# EAGLE board Joulev2_RealTime (EAGLE 8.1.1)
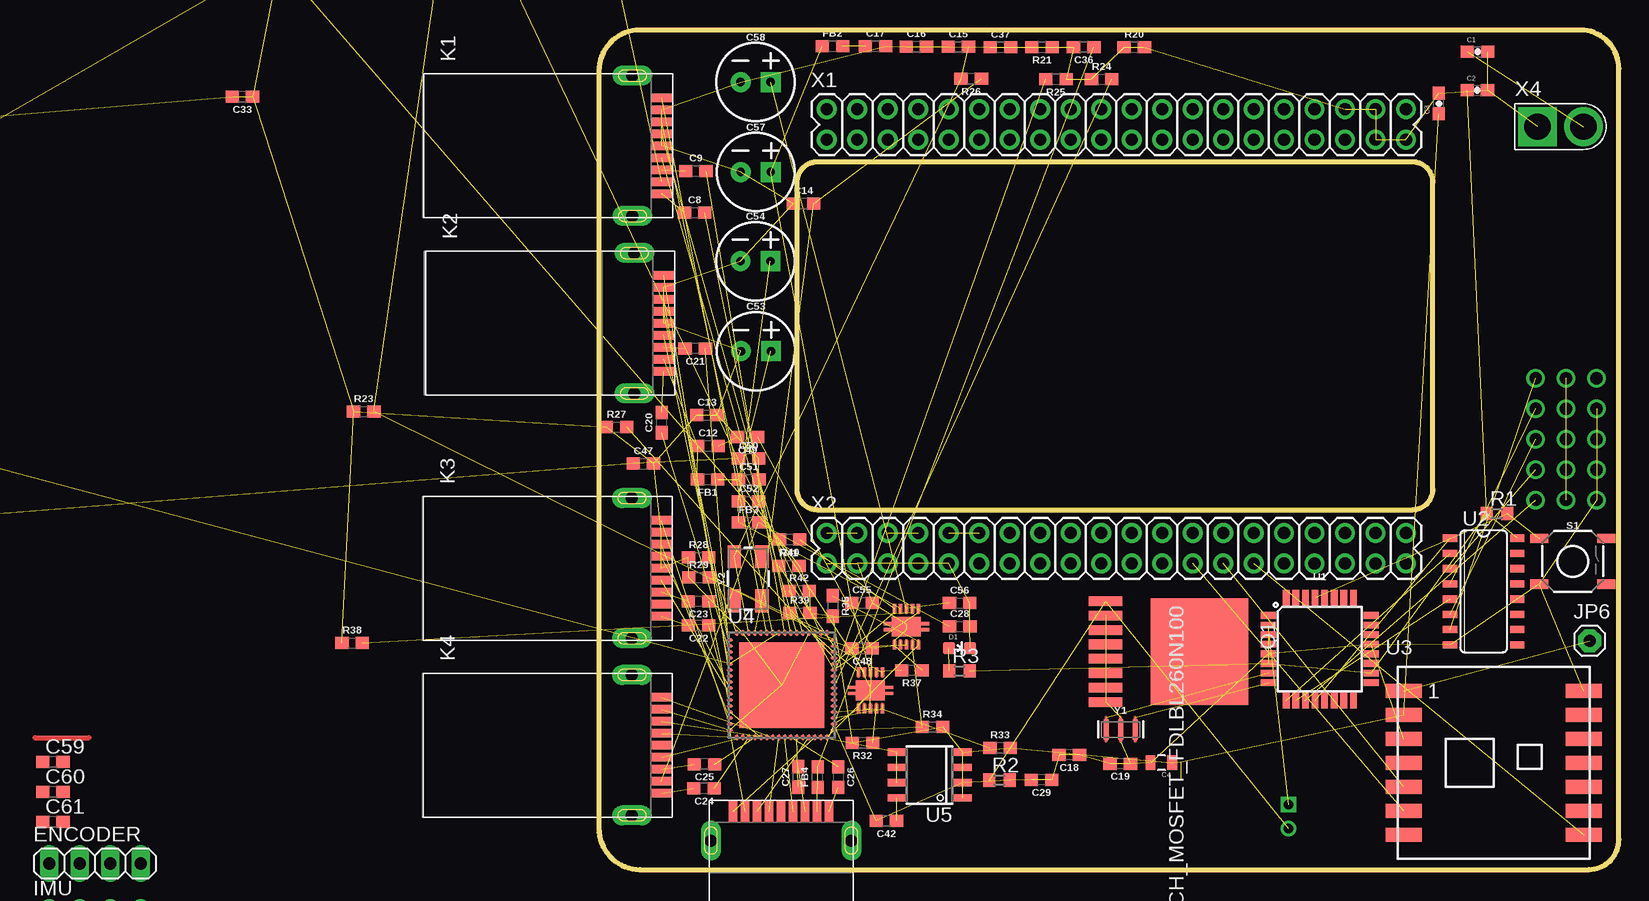
[diagram p0: board, top side]
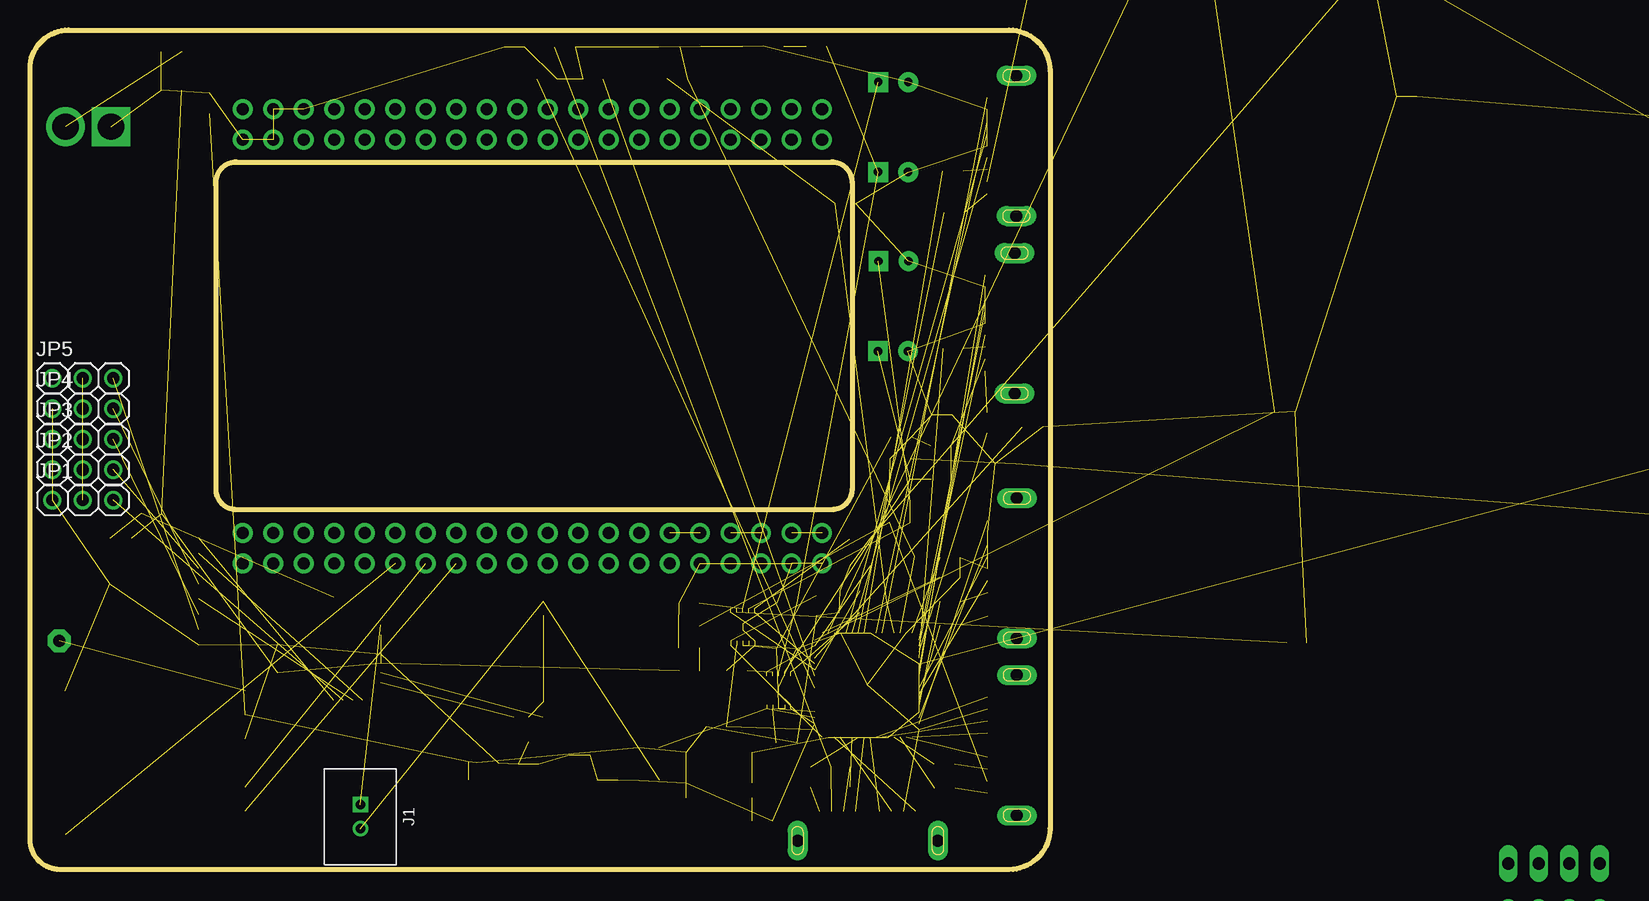
[diagram p1: board, bottom side, seen from below]

Size 85 x 70 mm. Coordinates in mm from the lower left corner, seen from the top.
Outline: 85,2.5 85,66.78 arc90 81.78,70 3.41,70 arc90 0,66.59 0,3.41 arc90 3.41,0 82.5,0 arc90 85,2.5
Outline: 16.5,57.29 16.5,31.71 arc90 18.21,30 67.79,30 arc90 69.5,31.71 69.5,57.29 arc90 67.79,59 18.21,59 arc90 16.5,57.29
Copper layers (1*16): Top 0.035mm / dielectric 1.5mm / Bottom 0.035mm
Design rules "default": minimum track width 10mil, minimum drill 24mil, track to track 8mil, track to pad 8mil, pad to pad 8mil, via to via 8mil, smd to smd 8mil, copper to edge 40mil, drill to drill 8mil, minimum pad ring 10mil, minimum via ring 8mil, stop-mask expansion 4mil, vias tented up to drill 0mil, thermal gap 10mil

## Footprints (pad centres in the part's own frame; a part is rotated, then mirrored left to right if it is on the bottom)
0603-CAP = smd 1.1 x 1: 1 -0.85,0; 2 0.85,0
0805@1 = smd 0.8 x 1.2: 1 -0.9,0; 2 0.9,0
0603 = smd 1.1 x 1: 1 -0.85,0; 2 0.85,0
CPOL-RADIAL-2.5MM-6.5MM = drill 0.7 pad 1.651 square: 1 1.25,0 | drill 0.7 pad 1.651: 2 -1.25,0
C0603 = smd 1.1 x 1: 1 -0.85,0; 2 0.85,0
LED-0603 = smd 1 x 1: A 0,-0.877; C 0,0.877
1X04 = drill 1.016 long: 1 -3.81,0; 2 -1.27,0; 3 1.27,0; 4 3.81,0
TO263-3 = smd 1.067 x 2.159: 1 -2.54,-5.791; 2 0,-5.791; 3 2.54,-5.791 | smd 10.8 x 10.41: TAB 0,2.54
2MM-2-V = drill 0.8 square: 1 0,0 | drill 0.8: 2 2,0
1X03 = drill 1.016: 1 -2.54,0; 2 0,0; 3 2.54,0
1X01 = drill 1.016 pad 1.93 octagon: 1 0,0
692112030100 = smd 0.7 x 1.8: 1 -3,0; 2 -1,0; 3 1,0; 4 3,0; 5 4,0; 6 2,0; 7 0,0; 8 -2,0; 9 -4,0 | drill 1 pad 1.676 long: Z1 5.85,2.45; Z2 -5.85,2.45
MO-299A = smd 8.9 x 8.1: DRAIN 0,2.58 | smd 0.8 x 2.8: GATE -4.2,-5.24; P2 -3,-5.24; P3 -1.8,-5.24; P4 -0.6,-5.24; P5 0.6,-5.24; P6 1.8,-5.24; P7 3,-5.24; P8 4.2,-5.24
R0603 = smd 1 x 1.1: 1 -0.85,0; 2 0.85,0
TACTILE_SWITCH_SMD_5.2MM = smd 1.524 x 0.762: 1 -2.794,1.905; 2 2.794,1.905; 3 -2.794,-1.905; 4 2.794,-1.905
TRAXXAS-CON = drill 2.2 square: GND -1.905,0 | drill 2.2: V+ 1.905,0
TQFP32-08 = smd 1.27 x 0.559: 1 -4.293,2.8; 2 -4.293,2; 3 -4.293,1.2; 4 -4.293,0.4; 5 -4.293,-0.4; 6 -4.293,-1.2; 7 -4.293,-2; 8 -4.293,-2.8; 17 4.293,-2.8; 18 4.293,-2; 19 4.293,-1.2; 20 4.293,-0.4; 21 4.293,0.4; 22 4.293,1.2; 23 4.293,2; 24 4.293,2.8 | smd 0.559 x 1.27: 9 -2.8,-4.293; 10 -2,-4.293; 11 -1.2,-4.293; 12 -0.4,-4.293; 13 0.4,-4.293; 14 1.2,-4.293; 15 2,-4.293; 16 2.8,-4.293; 25 2.8,4.293; 26 2,4.293; 27 1.2,4.293; 28 0.4,4.293; 29 -0.4,4.293; 30 -1.2,4.293; 31 -2,4.293; 32 -2.8,4.293
SO16 = smd 0.6 x 1.2: 1 -4.445,-2.8; 2 -3.175,-2.8; 3 -1.905,-2.8; 4 -0.635,-2.8; 5 0.635,-2.8; 6 1.905,-2.8; 7 3.175,-2.8; 8 4.445,-2.8; 9 4.445,2.8; 10 3.175,2.8; 11 1.905,2.8; 12 0.635,2.8; 13 -0.635,2.8; 14 -1.905,2.8; 15 -3.175,2.8; 16 -4.445,2.8
RFM69CW-XXXS2 = smd 3 x 1.2: 1 -7.5,6; 2 -7.5,4; 3 -7.5,2; 4 -7.5,0; 5 -7.5,-2; 6 -7.5,-4; 7 -7.5,-6; 8 7.5,-6; 9 7.5,-4; 10 7.5,-2; 11 7.5,0; 12 7.5,2; 13 7.5,4; 14 7.5,6
QFN64-9X9 = smd 0.55 x 0.25: 1 -4.35,3.75; 2 -4.35,3.25; 3 -4.35,2.75; 4 -4.35,2.25; 5 -4.35,1.75; 6 -4.35,1.25; 7 -4.35,0.75; 8 -4.35,0.25; 9 -4.35,-0.25; 10 -4.35,-0.75; 11 -4.35,-1.25; 12 -4.35,-1.75; 13 -4.35,-2.25; 14 -4.35,-2.75; 15 -4.35,-3.25; 16 -4.35,-3.75; 33 4.35,-3.75; 34 4.35,-3.25; 35 4.35,-2.75; 36 4.35,-2.25; 37 4.35,-1.75; 38 4.35,-1.25; 39 4.35,-0.75; 40 4.35,-0.25; 41 4.35,0.25; 42 4.35,0.75; 43 4.35,1.25; 44 4.35,1.75; 45 4.35,2.25; 46 4.35,2.75; 47 4.35,3.25; 48 4.35,3.75 | smd 0.25 x 0.55: 17 -3.75,-4.35; 18 -3.25,-4.35; 19 -2.75,-4.35; 20 -2.25,-4.35; 21 -1.75,-4.35; 22 -1.25,-4.35; 23 -0.75,-4.35; 24 -0.25,-4.35; 25 0.25,-4.35; 26 0.75,-4.35; 27 1.25,-4.35; 28 1.75,-4.35; 29 2.25,-4.35; 30 2.75,-4.35; 31 3.25,-4.35; 32 3.75,-4.35; 49 3.75,4.35; 50 3.25,4.35; 51 2.75,4.35; 52 2.25,4.35; 53 1.75,4.35; 54 1.25,4.35; 55 0.75,4.35; 56 0.25,4.35; 57 -0.25,4.35; 58 -0.75,4.35; 59 -1.25,4.35; 60 -1.75,4.35; 61 -2.25,4.35; 62 -2.75,4.35; 63 -3.25,4.35; 64 -3.75,4.35 | smd 7.1 x 7.1: EXP 0,0
SOIC8 = smd 0.6 x 1.5: 1 -1.905,-2.75; 2 -0.635,-2.75; 3 0.635,-2.75; 4 1.905,-2.75; 5 1.905,2.75; 6 0.635,2.75; 7 -0.635,2.75; 8 -1.905,2.75
10-VSON = smd 0.28 x 0.71: 1_1 1,1.545; 2_1 0.5,1.545; 3_1 0,1.545; 4_1 -0.5,1.545; 5_1 -1,1.545; 6_1 -1,-1.545; 7_1 -0.5,-1.545; 8_1 0,-1.545; 9_1 0.5,-1.545; 10_1 1,-1.545 | smd 0.28 x 0.28: 1_2 1,1.2; 2_2 0.5,1.2; 3_2 0,1.2; 4_2 -0.5,1.2; 5_2 -1,1.2; 6_2 -1,-1.2; 7_2 -0.5,-1.2; 8_2 0,-1.2; 9_2 0.5,-1.2; 10_2 1,-1.2 | smd 3.8 x 0.28: PAD1 0,0.25; PAD2 0,-0.25 | smd 2.4 x 1.65: PAD3 0,0
SOIC-14 = smd 0.6 x 2.2: 1 -3.81,-2.6; 2 -2.54,-2.6; 3 -1.27,-2.6; 4 0,-2.6; 5 1.27,-2.6; 6 2.54,-2.6; 7 3.81,-2.6; 8 3.81,2.6; 9 2.54,2.6; 10 1.27,2.6; 11 0,2.6; 12 -1.27,2.6; 13 -2.54,2.6; 14 -3.81,2.6
PW20 = smd 1.676 x 0.356: 1 -2.819,2.925; 2 -2.819,2.275; 3 -2.819,1.625; 4 -2.819,0.975; 5 -2.819,0.325; 6 -2.819,-0.325; 7 -2.819,-0.975; 8 -2.819,-1.625; 9 -2.819,-2.275; 10 -2.819,-2.925; 11 2.819,-2.925; 12 2.819,-2.275; 13 2.819,-1.625; 14 2.819,-0.975; 15 2.819,-0.325; 16 2.819,0.325; 17 2.819,0.975; 18 2.819,1.625; 19 2.819,2.275; 20 2.819,2.925
2X20 = drill 1.016 pad 1.651: 1 -24.13,-1.27; 2 -24.13,1.27; 3 -21.59,-1.27; 4 -21.59,1.27; 5 -19.05,-1.27; 6 -19.05,1.27; 7 -16.51,-1.27; 8 -16.51,1.27; 9 -13.97,-1.27; 10 -13.97,1.27; 11 -11.43,-1.27; 12 -11.43,1.27; 13 -8.89,-1.27; 14 -8.89,1.27; 15 -6.35,-1.27; 16 -6.35,1.27; 17 -3.81,-1.27; 18 -3.81,1.27; 19 -1.27,-1.27; 20 -1.27,1.27; 21 1.27,-1.27; 22 1.27,1.27; 23 3.81,-1.27; 24 3.81,1.27; 25 6.35,-1.27; 26 6.35,1.27; 27 8.89,-1.27; 28 8.89,1.27; 29 11.43,-1.27; 30 11.43,1.27; 31 13.97,-1.27; 32 13.97,1.27; 33 16.51,-1.27; 34 16.51,1.27; 35 19.05,-1.27; 36 19.05,1.27; 37 21.59,-1.27; 38 21.59,1.27; 39 24.13,-1.27; 40 24.13,1.27
RESONATOR-SMD-3.2X1.3 = smd 0.45 x 1.905: 1 -1.2,0; 2 0,0; 3 1.2,0
CRYSTAL-SMD-5X3.2-4PAD = smd 1.9 x 1.1: 1 -1.85,-1.15; 2 1.85,-1.15; 3 1.85,1.15; 4 -1.85,1.15

## Placement (x,y rotation side)
C1  0.22uF  [0603-CAP]  73.22,68.19 0 top
C2  .1uF  [0603-CAP]  73.21,64.97 0 top
C3  0.1uF  [0603-CAP]  70,63.87 90 top
C4  10uf  [0805@1]  46.88,8.9 180 top
C5  1nF  [0603]  -33.91,113.24 180 top  (outside the outline)
C6  0.1uF  [0603]  -19.9,121.26 0 top  (outside the outline)
C7  10uF  [0603]  -15.29,121.24 180 top  (outside the outline)
C8  0.1uF  [0603]  7.98,54.76 0 top
C9  0.1uF  [0603]  8.09,58.25 0 top
C10  1nF  [0603]  -41.87,126.56 180 top  (outside the outline)
C11  1.0uF  [0603]  -32.23,124.95 180 top  (outside the outline)
C12  0.1uF  [0603]  9.1,35.33 0 top
C13  0.1uF  [0603]  9.02,37.88 0 top
C14  18pF  [0603]  17.05,55.53 0 top
C15  18pF  [0603]  29.96,68.6 0 top
C16  1nF  [0603]  26.45,68.62 0 top
C17  0.1uF  [0603]  23.05,68.66 0 top
C18  0.1uF  [0603]  39.2,9.56 180 top
C19  1nF  [0603]  43.45,8.83 180 top
C20  0.1uF  [0603]  5.24,37.26 90 top
C21  0.1uF  [0603]  8.04,43.44 180 top
C22  0.1uF  [0603]  8.31,20.34 180 top
C23  0.1uF  [0603]  8.3,22.36 180 top
C24  0.1uF  [0603]  8.77,6.76 180 top
C25  0.1uF  [0603]  8.8,8.79 180 top
C26  0.1uF  [0603]  19.93,7.71 270 top
C27  0.1uF  [0603]  16.63,7.73 90 top
C28  0.1uF  [0603]  30.07,20.27 0 top
C29  0.1uF  [0603]  36.88,7.48 180 top
C30  10uF  [0603]  -37.66,133.16 0 top  (outside the outline)
C31  0.1uF  [0603]  -37.77,130.59 0 top  (outside the outline)
C32  0.1uF  [0603]  -47.29,124.41 180 top  (outside the outline)
C33  1nF  [0603]  -29.71,64.43 180 top  (outside the outline)
C34  4.7uF  [0603]  -26.93,75.1 270 top  (outside the outline)
C35  0.1uF  [0603]  -41.72,124.31 0 top  (outside the outline)
C36  0.1uF  [0603]  40.41,68.57 180 top
C37  0.1uF  [0603]  33.47,68.57 0 top
C38  0.1uF  [0603]  -41.66,122.18 0 top  (outside the outline)
C39  0.1uF  [0603]  -41.84,119.45 0 top  (outside the outline)
C40  0.1uF  [0603]  -79.97,41.65 0 top  (outside the outline)
C41  0.1uF  [0603]  -84.77,53.57 0 top  (outside the outline)
C42  10nF  [0603]  23.95,4.04 180 top
C43  4.7uF  [0603]  -110.86,20.11 180 top  (outside the outline)
C44  0.1uF  [0603]  -118.96,20.15 0 top  (outside the outline)
C45  0.1uF  [0603]  -118.95,22.12 0 top  (outside the outline)
C46  0.1uF  [0603]  -118.94,24.11 0 top  (outside the outline)
C47  0.1uF  [0603]  3.71,33.84 0 top
C48  0.1uF  [0603]  21.94,18.43 180 top
C49  0.1uF  [0603]  12.4,36.05 180 top
C50  10uF  [0603]  12.48,34.27 0 top
C51  0.1uF  [0603]  12.49,32.52 0 top
C52  0.1uF  [0603]  12.48,30.69 0 top
C53  150uF  [CPOL-RADIAL-2.5MM-6.5MM]  13.09,43.22 0 top
C54  150uF  [CPOL-RADIAL-2.5MM-6.5MM]  13.04,50.73 0 top
C55  0.1uF  [0603]  21.92,22.25 0 top
C56  0.1uF  [0603]  30.07,22.21 0 top
C57  150uF  [CPOL-RADIAL-2.5MM-6.5MM]  13.07,58.16 0 top
C58  150uF  [CPOL-RADIAL-2.5MM-6.5MM]  13.06,65.65 0 top
C59  0.1uF  [C0603]  -45.5,9 0 top  (outside the outline)
C60  0.1uF  [C0603]  -45.5,6.5 0 top  (outside the outline)
C61  10uF  [C0603]  -45.5,4 0 top  (outside the outline)
D1  [LED-0603]  30.05,18.46 270 top
ENCODER  [1X04]  -42,0.5 0 top  (outside the outline)
FB1  220@100MHz  [0603]  9.06,32.51 180 top
FB2  220@100MHz  [0603]  19.47,68.67 0 top
FB3  220@100MHz  [0603]  12.49,28.93 0 top
FB4  220@100Mhz  [0603]  18.23,7.71 90 top
FB5  220@100MHz  [0603]  -122.75,20.18 180 top  (outside the outline)
IC2  LM340S-12  [TO263-3]  -42,-15 0 top  (outside the outline)
IC3  LM340S-12  [TO263-3]  -29,-15 0 top  (outside the outline)
IMU  [1X04]  -42,-4 0 top  (outside the outline)
J1  2-PIN_2MM-V  [2MM-2-V]  57.47,5.41 270 bottom
JP1  [1X03]  80.6,30.8 0 bottom
JP2  [1X03]  80.6,33.34 0 bottom
JP3  [1X03]  80.6,35.88 0 bottom
JP4  [1X03]  80.6,38.42 0 bottom
JP5  [1X03]  80.6,40.96 0 bottom
JP6  antenna  [1X01]  82.56,19.07 0 top
K1  692112030100  [692112030100]  5.25,60.34 90 top
K2  692112030100  [692112030100]  5.41,45.55 90 top
K3  692112030100  [692112030100]  5.21,25.12 90 top
K4  692112030100  [692112030100]  5.21,10.37 90 top
K5  692112030100  [692112030100]  15.19,4.86 180 top
Q1  N_CH_MOSFET_FDLBL260N100  [MO-299A]  47.48,18.18 270 top
R1  10k ohm  [R0603]  74.86,29.68 0 top
R2  10k ohm  [R0603]  33.37,7.46 0 top
R3  680 ohm  [R0603]  30.05,16.56 0 top
R20  1M  [0603]  44.62,68.58 0 top
R21  1M  [0603]  36.94,68.56 180 top
R22  90.9k  [0603]  -7.69,115.44 270 top  (outside the outline)
R23  10k  [0603]  -19.59,38.19 0 top  (outside the outline)
R24  4.7k  [0603]  41.9,65.88 0 top
R25  4.7k  [0603]  38.09,65.88 180 top
R26  1M  [0603]  31.03,65.92 180 top
R27  4.7k  [0603]  1.47,36.88 0 top
R28  9.53k  [0603]  8.31,26 0 top
R29  4.7k  [0603]  8.34,24.34 0 top
R30  1M  [0603]  -75.03,60.87 0 top  (outside the outline)
R31  1M  [0603]  -86.62,65.27 0 top  (outside the outline)
R32  4.7k  [0603]  21.96,10.55 180 top
R33  4.7k  [0603]  33.44,10.15 0 top
R34  4.7k  [0603]  27.8,11.88 0 top
R35  4.7k  [0603]  19.48,21.98 270 top
R36  1M  [0603]  -114.38,20.03 180 top  (outside the outline)
R37  25.5k  [0603]  26.09,16.62 180 top
R38  25.5k  [0603]  -20.56,18.89 0 top  (outside the outline)
R39  10k  [0603]  16.75,21.38 0 top
R40  10k  [0603]  15.9,27.5 180 top
R41  10k  [0603]  15.84,25.33 0 top
R42  10k  [0603]  16.69,23.25 0 top
R43  10k ohm  [R0603]  -44.5,-25 0 top  (outside the outline)
S1  MOMENTARY-SWITCH 5.2mm  [TACTILE_SWITCH_SMD_5.2MM]  81.16,25.7 0 top
TRAXXAS_ESC_PWR  TRAXXAS-CON  [TRAXXAS-CON]  -42,-29.5 0 top  (outside the outline)
U1  ATMEGA328P_TQFP  [TQFP32-08]  60.08,18.38 0 top
U2  74VHC_MUXSO16  [SO16]  73.73,23.18 270 top
U3  RFM69CW  [RFM69CW-XXXS2]  74.56,8.9 0 top
U4  TUSB8041  [QFN64-9X9]  15.24,15.38 0 top
U5  ADP1706ARDZ-1.1-R7  [SOIC8]  27.56,7.88 90 top
U6  TPS2561DRCT  [10-VSON]  22.62,14.94 180 top
U7  TPS2561DRCT  [10-VSON]  25.62,20.25 180 top
U8  [SOIC-14]  -43,-37 270 top  (outside the outline)
U9  TXB0108PWR  [PW20]  -43,-45.5 0 top  (outside the outline)
X1  J12HEADER_(JOULE)  [2X20]  43.13,62.12 0 top
X2  J13HEADER_(JOULE)  [2X20]  43.13,26.78 0 top
X4  TRAXXAS-CON  [TRAXXAS-CON]  80.14,61.94 0 top
Y1  16MHz  [RESONATOR-SMD-3.2X1.3]  43.48,11.68 0 top
Y2  24MHz  [CRYSTAL-SMD-5X3.2-4PAD]  12.44,24.24 90 top

## Library data of the parts
C1 C2 = SparkFun-Capacitors; PROD_ID: CAP-07822
C3 C6 C8 C9 C12 C13 C17 C18 C20-C29 C31 C32 C35-C41 C44-C49 C51 C52 C55 C56 = SparkFun-Capacitors; PROD_ID: CAP-00810
C4 = SparkFun-Capacitors; PROD_ID: CAP-11624
C5 C10 C16 C19 C33 = SparkFun-Capacitors; PROD_ID: CAP-07886
C7 C30 C50 = SparkFun-Capacitors; PROD_ID: CAP-11015
C11 = SparkFun-Capacitors; PROD_ID: CAP-00868
C14 C15 = SparkFun-Capacitors; PROD_ID: CAP-08267
C34 C43 = SparkFun-Capacitors; PROD_ID: CAP-08280
C42 = SparkFun-Capacitors; PROD_ID: CAP-00867
C53 C54 C57 C58 = SparkFun-Capacitors; PROD_ID: CAP-08439
C59-C61 R1-R3 R43 = rcl
D1 = SparkFun-LED
ENCODER IMU = pinhead
FB1-FB5 = SparkFun-Coils; PROD_ID: NDUC-07859
IC2 IC3 = linear
J1 = RoboJackets-Connectors; PINS: 2; PIN_PITCH: 2.0 mm
JP1-JP6 = adafruit
K1-K5 Q1 TRAXXAS_ESC_PWR U2 U4-U7 U9 X1 X2 X4 = Roboracing
R20 R21 R26 R30 R31 R36 = SparkFun-Resistors; PROD_ID: RES-07868
R22 = SparkFun-Resistors; PROD_ID: RES-07828
R23 R39-R42 = SparkFun-Resistors; PROD_ID: RES-00824
R24 R25 R27 R29 R32-R35 = SparkFun-Resistors; PROD_ID: RES-07857
R28 = SparkFun-Resistors; PROD_ID: RES-12534
R37 R38 = SparkFun-Resistors; PROD_ID: RES-12186
S1 = Roboracing; PROD_ID: SWCH-08247; SF_SKU: COM-08720
U1 = SparkFun-IC-Microcontroller; PROD_ID: IC-09069
U3 = mike-temp
U8 = rgb-led
Y1 = SparkFun-Clocks; PROD_ID: XTAL-08900
Y2 = SparkFun-Clocks; PROD_ID: XTAL-08298; SF_ID: COM-08581

## Nets
1.1V: C30.1 C31.1 C32.1 C35.1 C38.1 C39.1 C40.1 C41.1 C43.1 U4.5 U4.8 U4.13 U4.21 U4.28 U4.31 U4.51 U4.57 U5.5 U5.6 U5.7
3.3V: C3.1 C4.1 C34.1 FB5.2 R32.2 R33.2 R34.2 R35.2 R39.2 R40.2 R41.2 R42.2 U3.2 U5.1 U5.3 U5.4
3P3V_MODE_SEL_GPIO0: X1.35
5V: C2.1 R1.1 R3.2 U1.4 U1.6 U1.18 U2.16
5V_MODE_SELECT: U1.12 U2.1
+3V3_HUB: C44.1 C45.1 C46.1 C47.1 C50.1 FB5.1
+5V: C48.1 C49.1 U6.2_1 U6.2_2 U6.3_1 U6.3_2 U7.2_1 U7.2_2 U7.3_1 U7.3_2
DIO0_3P3V: U3.9
DIO0_5V: U1.32
DN1_VBUS: C51.1 C53.1 FB1.1 U6.9_1 U6.9_2
DN2_VBUS: C55.1 C57.1 FB2.1 U6.8_1 U6.8_2
DN3_VBUS: C52.1 C54.1 FB3.1 U7.9_1 U7.9_2
DN4_VBUS: FB4.1
ESTOP: J1.1 U1.2
ESTOP_GATE: J1.2 Q1.GATE R2.1
GND: C1.2 C2.2 C3.2 C4.2 C5.1 C5.2 C6.1 C6.2 C7.2 C10.1 C10.2 C11.2 C12.2 C13.1 C13.2 C14.1 C15.1 C16.1 C16.2 C17.2 C18.1 C18.2 C19.1 C19.2 C28.2 C29.1 C29.2 C30.2 C31.2 C32.2 C33.1 C33.2 C34.2 C35.2 C36.2 C37.1 C37.2 C38.2 C39.2 C40.2 C41.2 C42.2 C43.2 C44.2 C45.2 C46.2 C47.2 C48.2 C49.2 C50.2 C51.2 C52.2 C53.2 C54.2 C55.2 C56.2 C57.2 C58.2 D1.C JP1.1 JP2.1 JP3.1 JP4.1 K1.4 K1.7 K2.4 K2.7 K3.4 K3.7 K4.4 K5.4 Q1.P2 Q1.P3 Q1.P4 Q1.P5 Q1.P6 Q1.P7 Q1.P8 R2.2 R20.1 R20.2 R21.1 R21.2 R23.1 R24.1 R25.1 R27.1 R28.1 R29.1 R30.1 R30.2 R31.1 R31.2 R36.1 R36.2 R37.1 R38.1 S1.3 U1.3 U1.5 U1.21 U2.8 U3.3 U3.14 U4.16 U4.34 U4.52 U4.63 U4.EXP U5.2 U6.1_1 U6.1_2 U6.PAD1 U6.PAD2 U6.PAD3 U7.1_1 U7.1_2 U7.PAD1 U7.PAD2 U7.PAD3 X1.36 X1.37 X1.38 X1.39 X2.1 X2.3 X2.5 X2.7 X2.9 X4.GND Y1.2
GRST#: C11.1 U4.50
I2C0_SCL: X1.13
I2C0_SDA: X1.11
ILIM1: R37.2 U6.7_1 U6.7_2
ILIM2: R38.2 U7.7_1 U7.7_2
ISH_GPIO_1: X1.33
ISH_GPIO_2: X1.31
ISH_GPIO_3: X1.29
MISO_3P3V: U3.8 X2.29
MISO_5V: U1.16
MOSI_3P3V: U3.5 X2.27
MOSI_5V: U1.15
N$1: JP6.1 U3.1
N$2: JP4.3 U2.4
N$3: JP5.3 U2.7
N$4: R1.2 S1.1 U1.29
N$5: Q1.DRAIN
N$6: U1.7 Y1.1
N$7: JP1.2 JP2.2 JP3.2 JP4.2 JP5.2
N$8: U1.8 Y1.3
N$9: R28.2 U4.64
N$10: JP2.3 U2.3
N$11: JP3.3 U2.6
N$18: R29.2 U4.49
N$20: D1.A R3.1
N$22: R27.2 U4.45
N$23: R25.2 U4.42
N$24: R24.2 U4.40
N$25: R22.2 R23.2 U4.48
N$26: C27.1 U4.27
N$27: C26.1 U4.26
N$28: C25.1 U4.20
N$29: C24.1 U4.19
N$30: C23.1 U4.12
N$31: C22.1 U4.11
N$32: C21.1 U4.4
N$33: C20.1 U4.3
N$35: C12.1 FB1.2 K2.1
N$36: C42.1 U5.8
N$38: C17.1 FB2.2
N$40: C28.1 FB3.2 K4.1
N$45: C56.1 C58.1 U7.8_1 U7.8_2
N$73: C36.1 FB4.2 K5.1
NSS_3P3V: U3.7
NSS_5V: U1.14
OVERCUR1Z: R39.1 U4.46 U6.10_1 U6.10_2
OVERCUR2Z: R41.1 U4.47 U6.6_1 U6.6_2
OVERCUR3Z: R40.1 U4.44 U7.10_1 U7.10_2
OVERCUR4Z: R42.1 U4.43 U7.6_1 U7.6_2
PC_PWM_SERVO: U1.9 U2.2
PC_PWM_THROTTLE: U1.10 U2.5
PWRCTL1_BATEN1: R32.1 U4.36 U6.4_1 U6.4_2
PWRCTL2_BATEN2: R33.1 U4.35 U6.5_1 U6.5_2
PWRCTL3_BATEN3: R34.1 U4.33 U7.4_1 U7.4_2
PWRCTL4_BATEN4: R35.1 U4.32 U7.5_1 U7.5_2
RC_MODE: JP1.3 U1.11
S$2: X2.6 X2.8
SCK_3P3V: U3.6 X2.25
SPI0_FS0: X2.19
SPI0_FS1: X2.21
SPI0_FS2: X2.23
USB_DM_DN1: K2.2 U4.2
USB_DM_DN2: K3.2 U4.10
USB_DM_DN3: K4.2 U4.18
USB_DM_DN4: K5.2 U4.25
USB_DP_DN1: K2.3 U4.1
USB_DP_DN2: K3.3 U4.9
USB_DP_DN3: K4.3 U4.17
USB_DP_DN4: K5.3 U4.24
USB_SSRXM_DN1: K2.5 U4.7
USB_SSRXM_DN2: K3.5 U4.15
USB_SSRXM_DN3: K4.5 U4.23
USB_SSRXM_DN4: K5.5 U4.30
USB_SSRXP_DN1: K2.6 U4.6
USB_SSRXP_DN2: K3.6 U4.14
USB_SSRXP_DN3: K4.6 U4.22
USB_SSRXP_DN4: K5.6 U4.29
USB_SSTXM_DN1: C21.2 K2.8
USB_SSTXM_DN2: C23.2 K3.8
USB_SSTXM_DN3: C25.2 K4.8
USB_SSTXM_DN4: C27.2 K5.8
USB_SSTXP_DN1: C20.2 K2.9
USB_SSTXP_DN2: C22.2 K3.9
USB_SSTXP_DN3: C24.2 K4.9
USB_SSTXP_DN4: C26.2 K5.9
USBA_USB2_1_DN: K1.2 U4.54
USBA_USB2_1_DP: K1.3 U4.53
USBA_USB3_1_RX_DN: K1.5 U4.59
USBA_USB3_1_RX_DP: K1.6 U4.58
USBA_USB3_1_TX_DN: C9.1 K1.8
USBA_USB3_1_TX_DP: C8.1 K1.9
V1P8V: X2.10 X2.12
V5P0V: X2.2 X2.4
VBUS_HUB: C7.1 K1.1 R22.1
VCC: C1.1 X4.V+
X: C8.2 U4.55
XI: C15.2 R26.2 U4.62 Y2.3
XO: C14.2 R26.1 U4.61 Y2.1
Y: C9.2 U4.56

## Tracks (layer width: path | path; a pad name or v marks a point on that pad's centre or on a via)
1.1V  (19 unrouted)
3.3V  (17 unrouted)
5V  (6 unrouted)
5V_MODE_SELECT  (1 unrouted)
+3V3_HUB  (5 unrouted)
+5V  (9 unrouted)
DN1_VBUS  (4 unrouted)
DN2_VBUS  (4 unrouted)
DN3_VBUS  (4 unrouted)
ESTOP  (1 unrouted)
ESTOP_GATE  (2 unrouted)
GND  (130 unrouted)
GRST#  (1 unrouted)
ILIM1  (2 unrouted)
ILIM2  (2 unrouted)
MISO_3P3V  (1 unrouted)
MOSI_3P3V  (1 unrouted)
N$1  (1 unrouted)
N$2  (1 unrouted)
N$3  (1 unrouted)
N$4  (2 unrouted)
N$6  (1 unrouted)
N$7  (4 unrouted)
N$8  (1 unrouted)
N$9  (1 unrouted)
N$10  (1 unrouted)
N$11  (1 unrouted)
N$13
  Top 0.406: -47,11 -42.5,11
N$18  (1 unrouted)
N$20  (1 unrouted)
N$22  (1 unrouted)
N$23  (1 unrouted)
N$24  (1 unrouted)
N$25  (2 unrouted)
N$26  (1 unrouted)
N$27  (1 unrouted)
N$28  (1 unrouted)
N$29  (1 unrouted)
N$30  (1 unrouted)
N$31  (1 unrouted)
N$32  (1 unrouted)
N$33  (1 unrouted)
N$35  (2 unrouted)
N$36  (1 unrouted)
N$38  (1 unrouted)
N$40  (2 unrouted)
N$45  (3 unrouted)
N$73  (2 unrouted)
OVERCUR1Z  (3 unrouted)
OVERCUR2Z  (3 unrouted)
OVERCUR3Z  (3 unrouted)
OVERCUR4Z  (3 unrouted)
PC_PWM_SERVO  (1 unrouted)
PC_PWM_THROTTLE  (1 unrouted)
PWRCTL1_BATEN1  (3 unrouted)
PWRCTL2_BATEN2  (3 unrouted)
PWRCTL3_BATEN3  (3 unrouted)
PWRCTL4_BATEN4  (3 unrouted)
RC_MODE  (1 unrouted)
S$2  (1 unrouted)
SCK_3P3V  (1 unrouted)
USB_DM_DN1  (1 unrouted)
USB_DM_DN2  (1 unrouted)
USB_DM_DN3  (1 unrouted)
USB_DM_DN4  (1 unrouted)
USB_DP_DN1  (1 unrouted)
USB_DP_DN2  (1 unrouted)
USB_DP_DN3  (1 unrouted)
USB_DP_DN4  (1 unrouted)
USB_SSRXM_DN1  (1 unrouted)
USB_SSRXM_DN2  (1 unrouted)
USB_SSRXM_DN3  (1 unrouted)
USB_SSRXM_DN4  (1 unrouted)
USB_SSRXP_DN1  (1 unrouted)
USB_SSRXP_DN2  (1 unrouted)
USB_SSRXP_DN3  (1 unrouted)
USB_SSRXP_DN4  (1 unrouted)
USB_SSTXM_DN1  (1 unrouted)
USB_SSTXM_DN2  (1 unrouted)
USB_SSTXM_DN3  (1 unrouted)
USB_SSTXM_DN4  (1 unrouted)
USB_SSTXP_DN1  (1 unrouted)
USB_SSTXP_DN2  (1 unrouted)
USB_SSTXP_DN3  (1 unrouted)
USB_SSTXP_DN4  (1 unrouted)
USBA_USB2_1_DN  (1 unrouted)
USBA_USB2_1_DP  (1 unrouted)
USBA_USB3_1_RX_DN  (1 unrouted)
USBA_USB3_1_RX_DP  (1 unrouted)
USBA_USB3_1_TX_DN  (1 unrouted)
USBA_USB3_1_TX_DP  (1 unrouted)
V1P8V  (1 unrouted)
V5P0V  (1 unrouted)
VBUS_HUB  (2 unrouted)
VCC  (1 unrouted)
X  (1 unrouted)
XI  (3 unrouted)
XO  (3 unrouted)
Y  (1 unrouted)